# EAGLE board controlBoard (EAGLE 9.6.2)
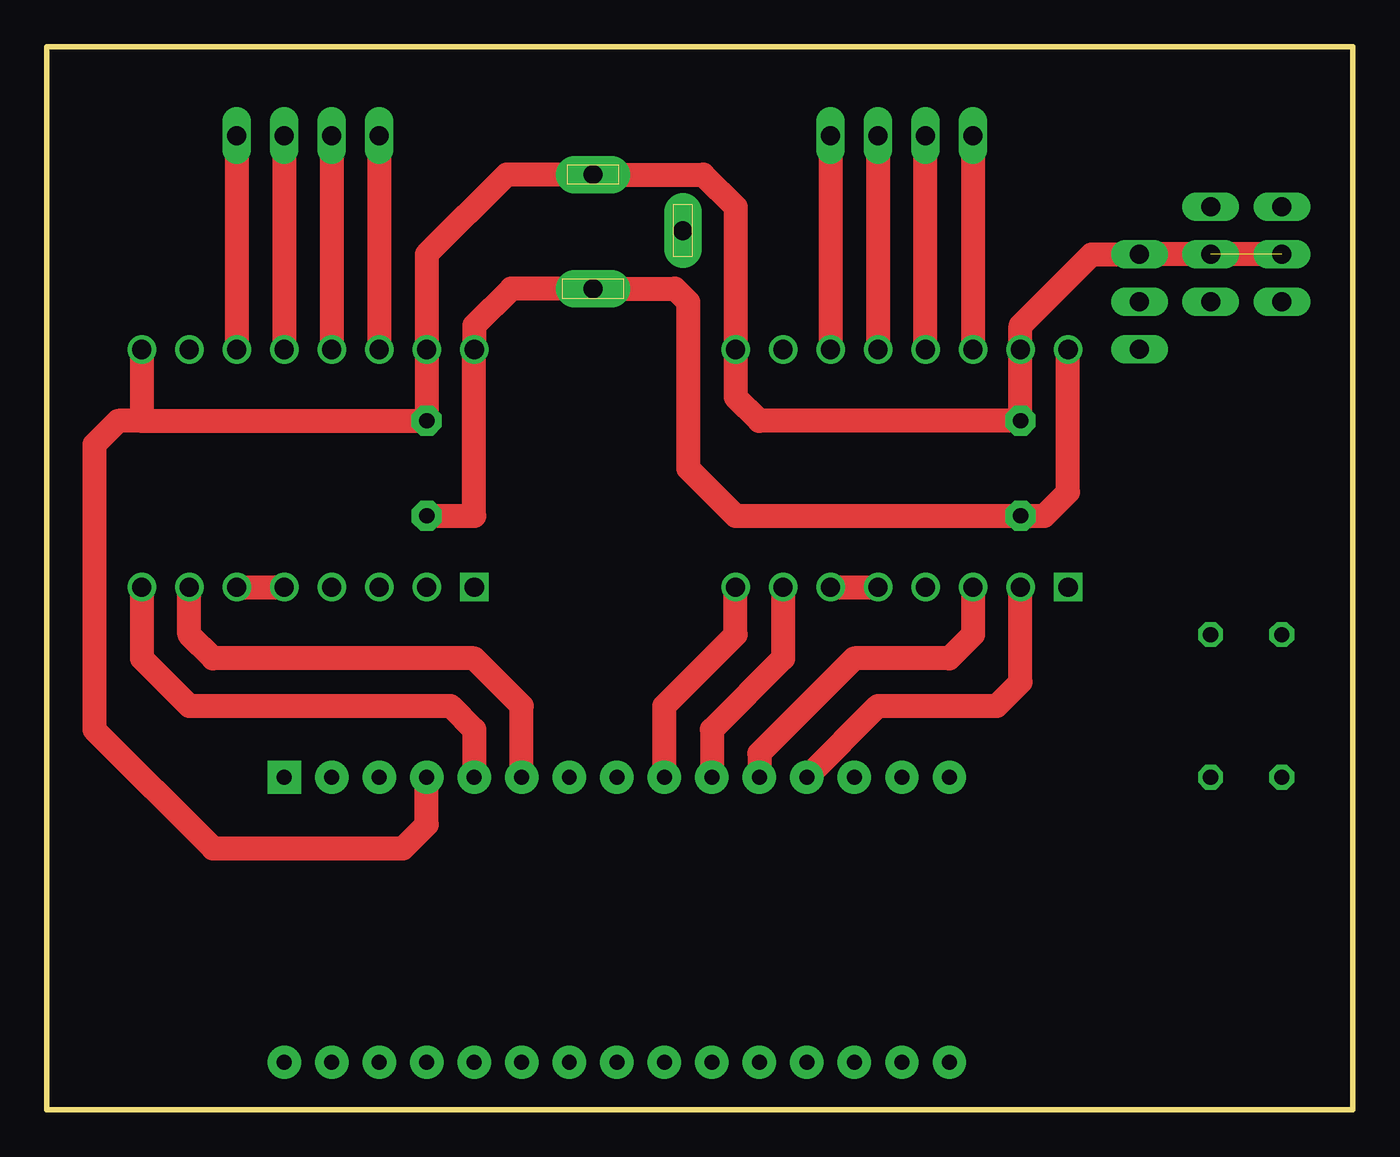
[diagram p0: board, top side]
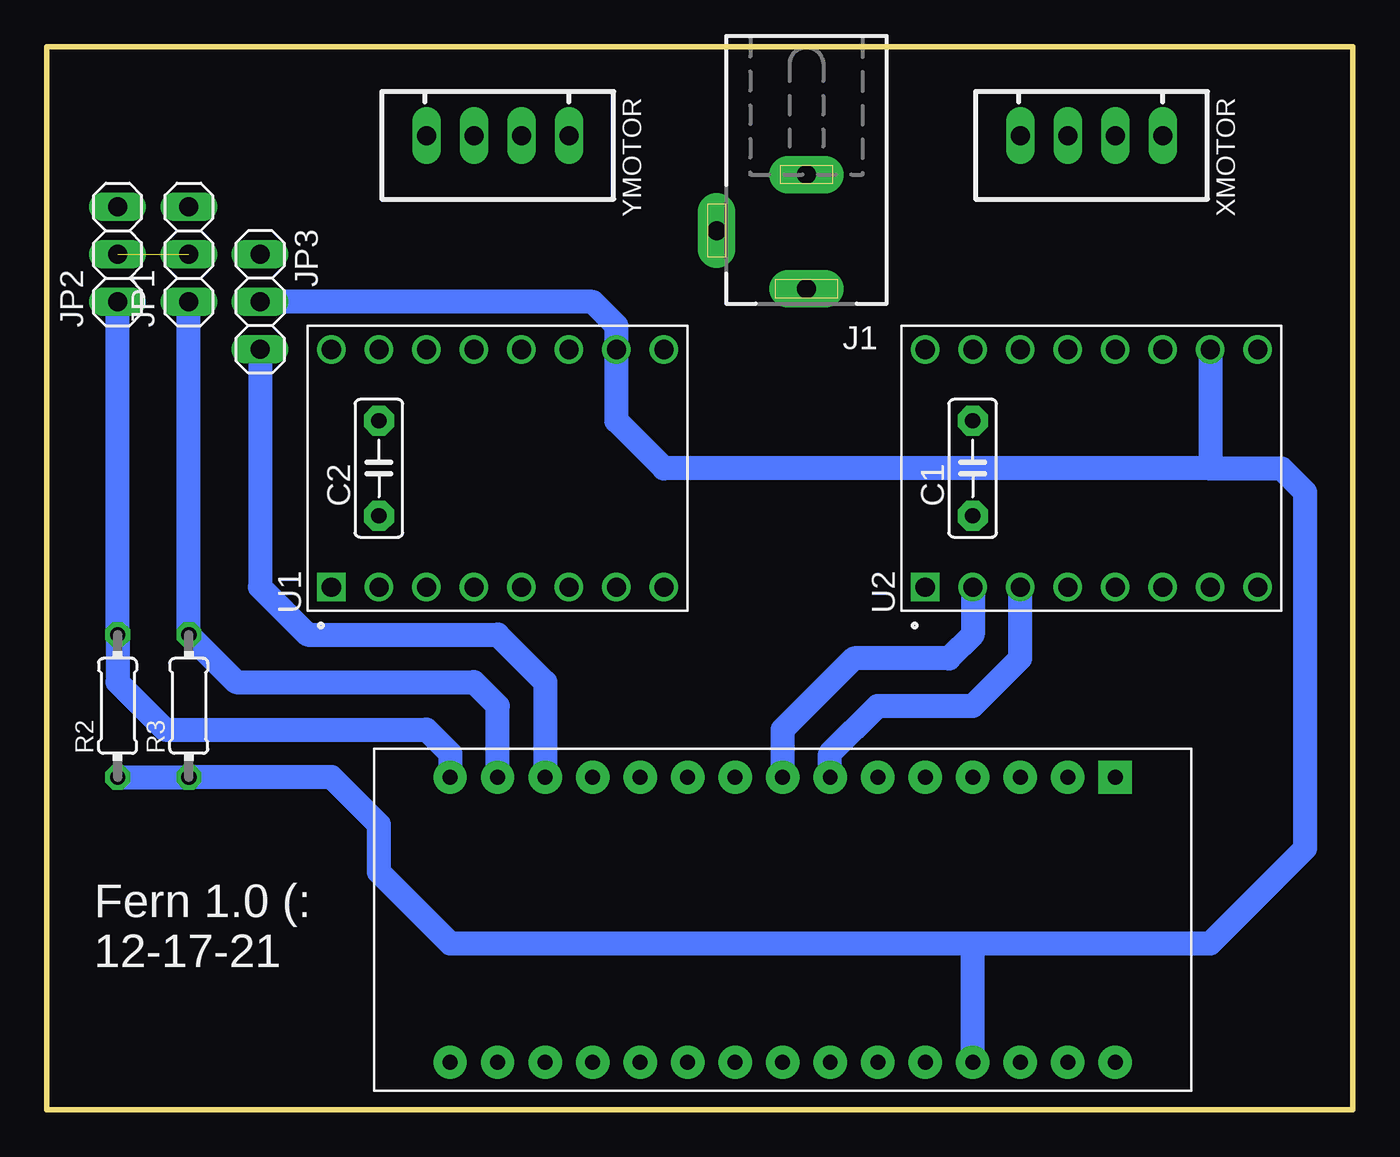
[diagram p1: board, bottom side, seen from below]

Size 69.83 x 56.82 mm. Coordinates in mm from the lower left corner, seen from the top.
Outline: 0,0 69.83,0 69.83,56.82 0,56.82 0,0
Copper layers (1*16): Top 0.035mm / dielectric 1.5mm / Bottom 0.035mm
Design rules "default": minimum track width 6mil, minimum drill 0.35mm, track to track 6mil, track to pad 6mil, pad to pad 6mil, via to via 6mil, smd to smd 6mil, copper to edge 40mil, drill to drill 6mil, minimum pad ring 10mil, minimum via ring 8mil, stop-mask expansion 4mil, vias tented up to drill 0mil, thermal gap 10mil

## Footprints (pad centres in the part's own frame; a part is rotated, then mirrored left to right if it is on the bottom)
C5B2.5 = drill 0.813 pad 1.6 octagon: 1 -2.54,0; 2 2.54,0
DCJ0202 = drill 1 pad 2 long: 1 0,3.1; 2 4.8,0; 3 0,-3
1X03 = drill 1.016 long: 1 -2.54,0; 2 0,0; 3 2.54,0
0204/7 = drill 0.813 octagon: 1 -3.81,0; 2 3.81,0
MODULE_A4988_STEPPER_MOTOR_DRIVER_CARRIER = drill 1.02 square: 1 -6.35,8.89 | drill 1.02: 2 -6.35,6.35; 3 -6.35,3.81; 4 -6.35,1.27; 5 -6.35,-1.27; 6 -6.35,-3.81; 7 -6.35,-6.35; 8 -6.35,-8.89; 9 6.35,-8.89; 10 6.35,-6.35; 11 6.35,-3.81; 12 6.35,-1.27; 13 6.35,1.27; 14 6.35,3.81; 15 6.35,6.35; 16 6.35,8.89
PDIP-32 = drill 0.8 pad 1.778: 3V3 15.24,-35.56; +5V 15.24,-10.16; A0 15.24,-12.7; A1 15.24,-15.24; A2 15.24,-17.78; A3 15.24,-20.32; A4 15.24,-22.86; A5 15.24,-25.4; A6 15.24,-27.94; A7 15.24,-30.48; AREF 15.24,-33.02; D0/RX 0,-5.08; D2 0,-12.7; D3 0,-15.24; D4 0,-17.78; D5 0,-20.32; D6 0,-22.86; D7 0,-25.4; D8 0,-27.94; D9 0,-30.48; D10 0,-33.02; D11 0,-35.56; D12 0,-38.1; D13 15.24,-38.1; GND 0,-10.16; GND1 15.24,-5.08; RESET 0,-7.62; RESET1 15.24,-7.62; VIN 15.24,-2.54 | drill 0.8 pad 1.778 square: D1/TX 0,-2.54
JST-XH-04-PACKAGE-LONG-PAD = drill 1.016 long: 1 -3.81,0; 2 -1.27,0; 3 1.27,0; 4 3.81,0

## Placement (x,y rotation side)
C1  [C5B2.5]  20.32,34.29 90 bottom
C2  [C5B2.5]  52.07,34.29 90 bottom
J1  DCJ0202  [DCJ0202]  29.21,46.99 180 bottom
JP1  [1X03]  62.23,45.72 90 bottom
JP2  [1X03]  66.04,45.72 90 bottom
JP3  [1X03]  58.42,43.18 270 bottom
R2  [0204/7]  66.04,21.59 90 bottom
R3  [0204/7]  62.23,21.59 90 bottom
U1  A4988_STEPPER_MOTOR_DRIVER_CARRIER  [MODULE_A4988_STEPPER_MOTOR_DRIVER_CARRIER]  45.72,34.29 90 bottom
U2  A4988_STEPPER_MOTOR_DRIVER_CARRIER  [MODULE_A4988_STEPPER_MOTOR_DRIVER_CARRIER]  13.97,34.29 90 bottom
U$1  ARDUINONANO  [PDIP-32]  10.16,17.78 270 bottom
XMOTOR  JST-XH-04-PIN-LONG-PAD  [JST-XH-04-PACKAGE-LONG-PAD]  13.97,52.07 180 bottom
YMOTOR  JST-XH-04-PIN-LONG-PAD  [JST-XH-04-PACKAGE-LONG-PAD]  45.72,52.07 180 bottom

## Library data of the parts
C1 C2 = capacitor-wima
J1 = con-jack; OC_FARNELL: unknown; OC_NEWARK: unknown
JP1-JP3 = pinhead
R2 R3 = rcl; SPICEPREFIX: R
U1 U2 = A4988_STEPPER_MOTOR_DRIVER_CARRIER; AVAILABILITY: Not in stock; DESCRIPTION: Stepper Motor Driver; MF: Pololu; MP: A4988 STEPPER MOTOR DRIVER CARRIER; PACKAGE: None; PRICE: None
U$1 = nano-ijbd
XMOTOR YMOTOR = Rembrandt Electronics - JST XH Connectors v1-0

## Nets
+5V: JP3.2 R2.1 R3.1 U1.10 U2.10 U$1.+5V
+12V: C1.1 C2.1 J1.1 U1.16 U2.16
GND: C1.2 C2.2 J1.3 JP1.2 JP2.2 JP3.1 U1.9 U1.15 U2.9 U2.15 U$1.GND
N$1: U2.5 U2.6
N$2: U1.5 U1.6
SERVO: JP3.3 U$1.D10
X1A: U2.12 XMOTOR.2
X1B: U2.11 XMOTOR.1
X2A: U2.13 XMOTOR.3
X2B: U2.14 XMOTOR.4
XBUMPER: JP1.1 R3.2 U$1.D11
XDIR: U2.8 U$1.D2
XMS1: U2.2 U$1.D5
XMS2: U2.3 U$1.D4
XSTEP: U2.7 U$1.D3
Y1A: U1.12 YMOTOR.2
Y1B: U1.11 YMOTOR.1
Y2A: U1.13 YMOTOR.3
Y2B: U1.14 YMOTOR.4
YBUMPER: JP2.1 R2.2 U$1.D12
YDIR: U1.8 U$1.D6
YMS1: U1.2 U$1.D9
YMS2: U1.3 U$1.D8
YSTEP: U1.7 U$1.D7

## Tracks (layer width: path | path; a pad name or v marks a point on that pad's centre or on a via)
+5V
  Bottom 1.27: U2.10 7.62,34.29 | 7.62,34.29 36.83,34.29 39.37,36.83 U1.10 39.37,41.91 40.64,43.18 JP3.2 | 7.62,34.29 3.81,34.29 2.54,33.02 2.54,13.97 7.62,8.89 20.32,8.89 | U$1.+5V 20.32,8.89 | 20.32,8.89 48.26,8.89 52.07,12.7 52.07,15.24 54.61,17.78 R3.1 R2.1
+12V
  Top 1.27: U1.16 54.61,33.02 53.34,31.75 C2.1 36.83,31.75 34.29,34.29 34.29,43.18 33.58,43.89 J1.1 24.84,43.89 22.86,41.91 U2.16 22.86,31.75 C1.1
GND  (1 unrouted)
  Top 1.27: JP2.2 JP3.1 55.88,45.72 52.07,41.91 U1.15 C2.2 38.1,36.83 36.83,38.1 U1.9 36.83,48.26 35.1,49.99 J1.3 24.59,49.99 20.32,45.72 U2.15 C1.2 5.08,36.83 | U2.9 5.08,36.83 | 5.08,36.83 3.81,36.83 2.54,35.56 2.54,20.32 8.89,13.97 19.05,13.97 20.32,15.24 U$1.GND
N$1
  Top 1.27: U2.6 U2.5
N$2
  Top 1.27: U1.6 U1.5
SERVO
  Bottom 1.27: U$1.D10 43.18,22.86 45.72,25.4 55.88,25.4 58.42,27.94 JP3.3
X1A
  Top 1.27: XMOTOR.2 U2.12
X1B
  Top 1.27: XMOTOR.1 U2.11
X2A
  Top 1.27: XMOTOR.3 U2.13
X2B
  Top 1.27: XMOTOR.4 U2.14
XBUMPER
  Bottom 1.27: JP1.1 R3.2 59.69,22.86 46.99,22.86 45.72,21.59 U$1.D11
XDIR
  Top 1.27: U2.8 5.08,24.13 7.62,21.59 21.59,21.59 22.86,20.32 U$1.D2
XMS1
  Bottom 1.27: U2.2 20.32,25.4 21.59,24.13 26.67,24.13 30.48,20.32 U$1.D5
XMS2
  Bottom 1.27: U$1.D4 27.94,19.05 25.4,21.59 20.32,21.59 17.78,24.13 U2.3
XSTEP
  Top 1.27: U2.7 7.62,25.4 8.89,24.13 22.86,24.13 25.4,21.59 U$1.D3
Y1A
  Top 1.27: YMOTOR.2 U1.12
Y1B
  Top 1.27: YMOTOR.1 U1.11
Y2A
  Top 1.27: U1.13 YMOTOR.3
Y2B
  Top 1.27: YMOTOR.4 U1.14
YBUMPER
  Bottom 1.27: JP2.1 R2.2 66.04,22.86 63.5,20.32 49.53,20.32 48.26,19.05 U$1.D12
YDIR
  Top 1.27: U$1.D6 33.02,21.59 36.83,25.4 U1.8
YMS1
  Top 1.27: U1.2 52.07,22.86 50.8,21.59 44.45,21.59 U$1.D9
YMS2
  Top 1.27: U1.3 49.53,25.4 48.26,24.13 43.18,24.13 38.1,19.05 U$1.D8
YSTEP
  Top 1.27: U1.7 39.37,24.13 35.56,20.32 U$1.D7

## Text on the board
bNames: Fern 1.0 (: / 12-17-21